# EAGLE board sensor 16 ADC (EAGLE 4.11)
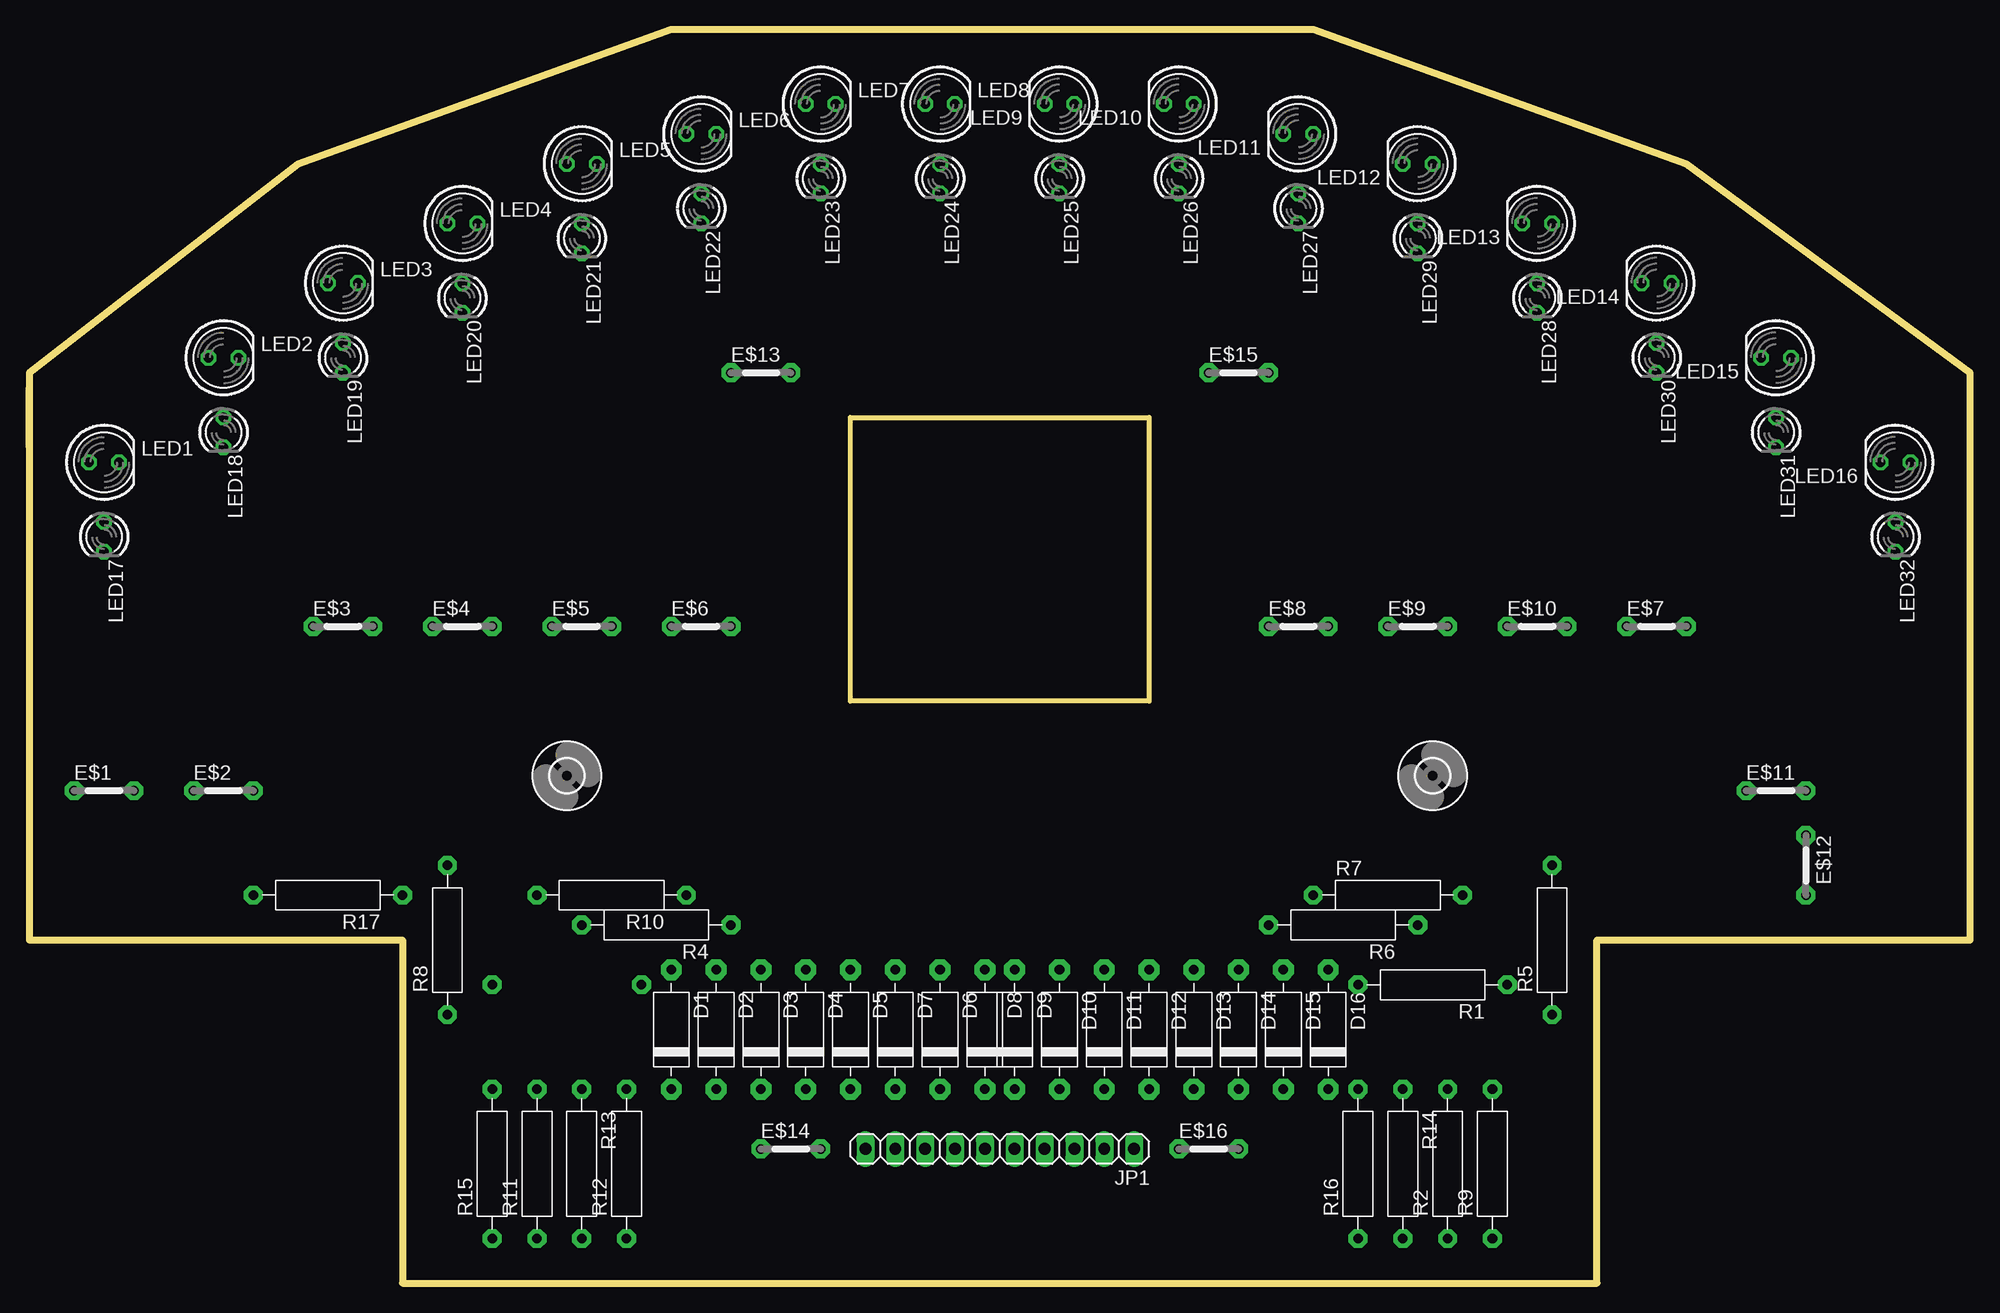
[diagram p0: board, top side]
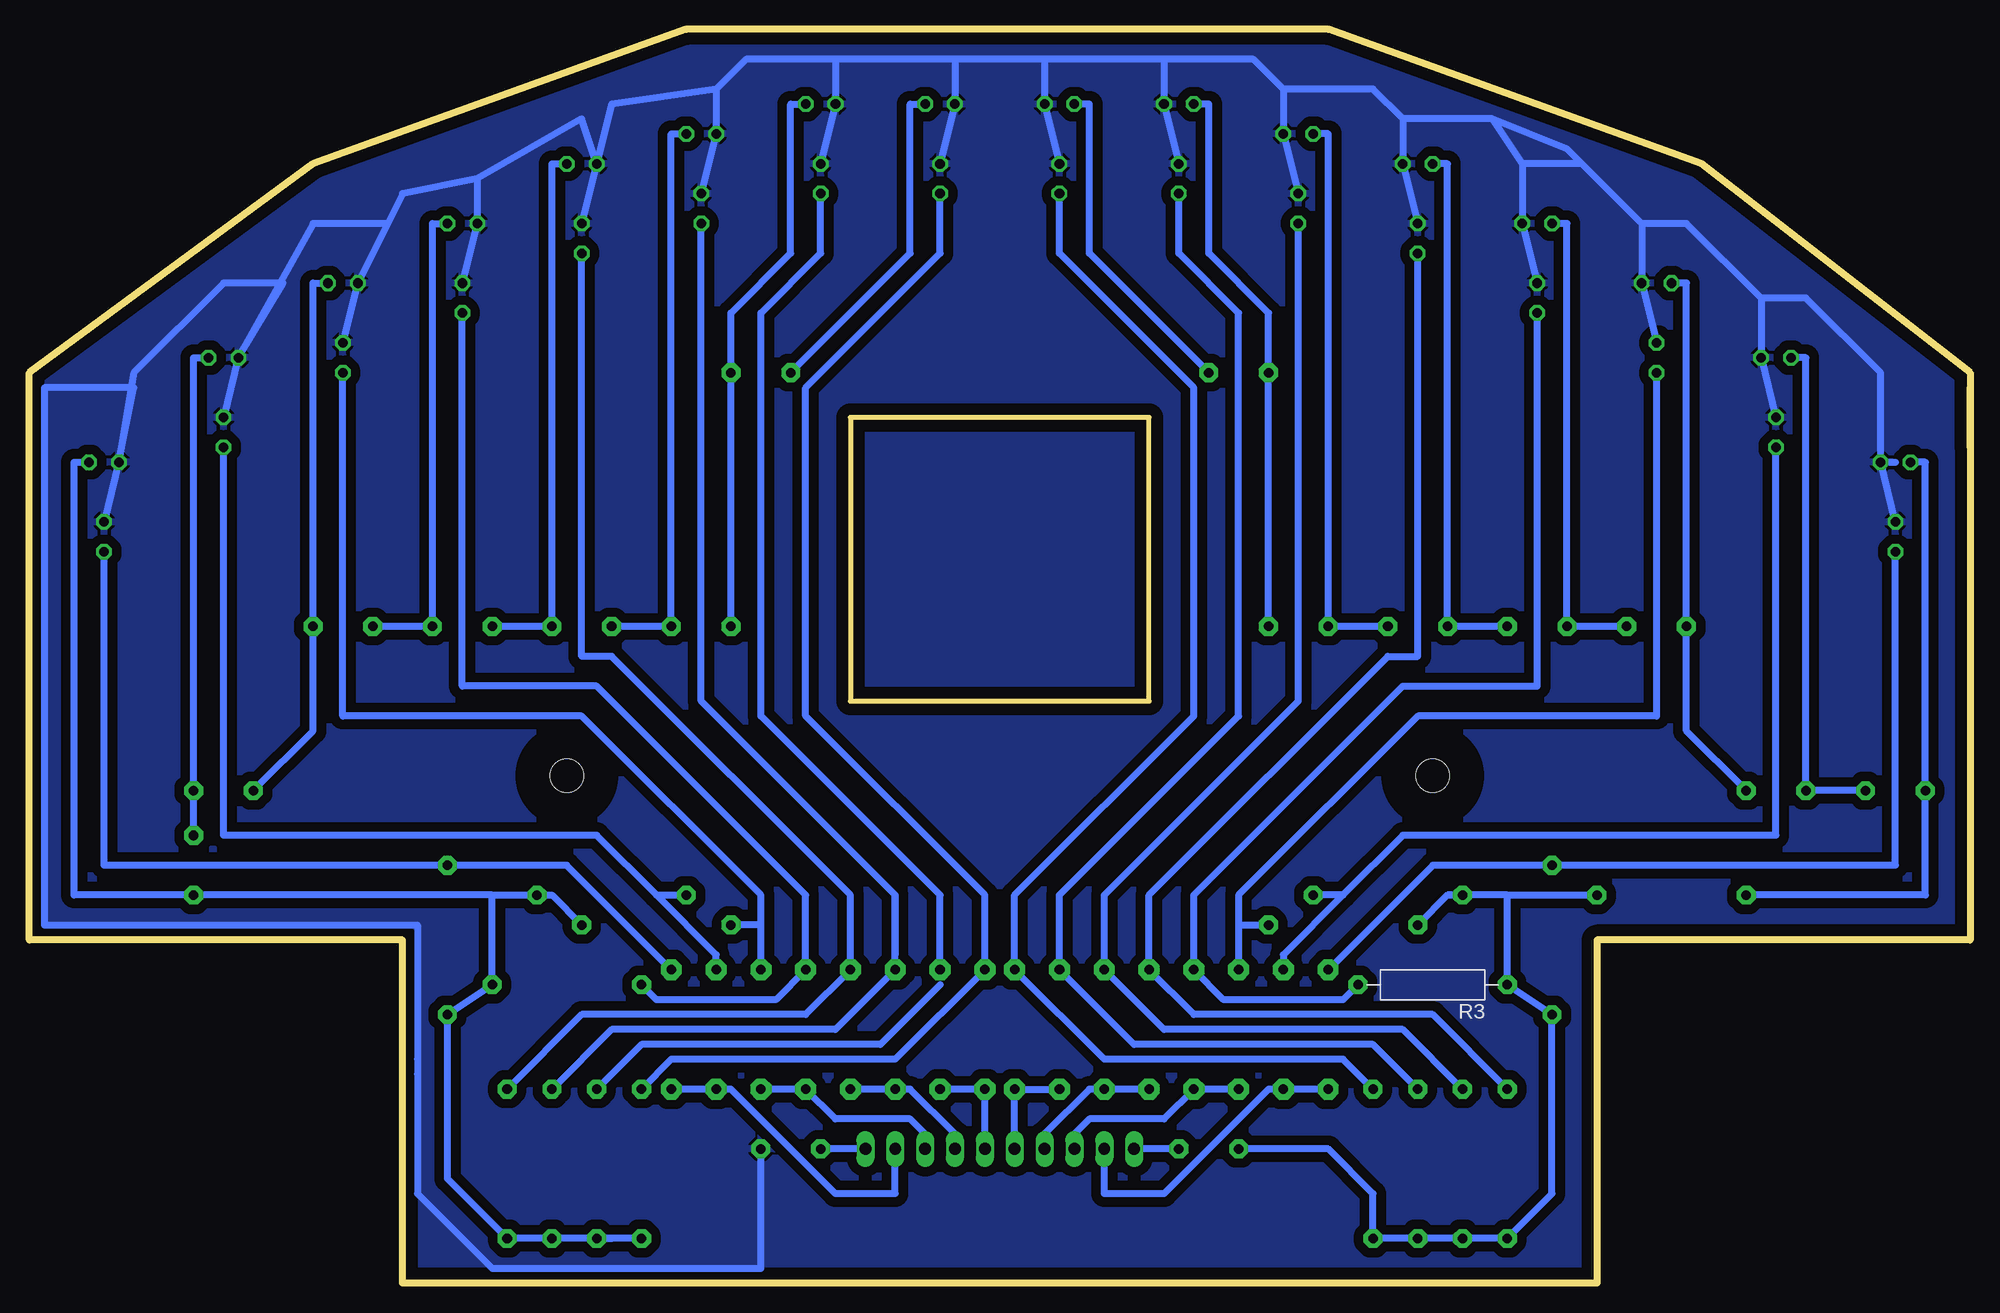
[diagram p1: board, bottom side, seen from below]

Size 165.1 x 106.68 mm. Coordinates in mm from the lower left corner, seen from the top.
Outline: 0,71.12 0,77.47 22.86,95.25 54.61,106.68 109.22,106.68 140.97,95.25 165.1,77.47 165.1,29.21 133.35,29.21 133.35,0 31.75,0 31.75,29.21 0,29.21 0,71.12
Outline: 0,71.12 0,76.2
Outline: 69.85,73.66 95.25,73.66 95.25,49.53 69.85,49.53 69.85,73.66
Copper layers (1*16): Top 0.035mm / dielectric 1.5mm / Bottom 0.035mm
Design rules "default": minimum track width 20mil, minimum drill 24mil, track to track 12mil, track to pad 12mil, pad to pad 12mil, via to via 12mil, smd to smd 8mil, copper to edge 40mil, drill to drill 8mil, minimum pad ring 10mil, minimum via ring 8mil, stop-mask expansion 4mil, vias tented up to drill 0mil, thermal gap 10mil

## Footprints (pad centres in the part's own frame; a part is rotated, then mirrored left to right if it is on the bottom)
D-10 = drill 0.813 pad 1.778 octagon: 1 -5.08,0; 2 5.08,0
05 = drill 0.813 pad 1.6 octagon: 1 -2.54,0; 2 2.54,0
2,8 = hole 2.8: 0,0
1X10 = drill 1.016 long: 1 -11.43,0; 2 -8.89,0; 3 -6.35,0; 4 -3.81,0; 5 -1.27,0; 6 1.27,0; 7 3.81,0; 8 6.35,0; 9 8.89,0; 10 11.43,0
LED5MM = drill 0.813 octagon: A -1.27,0; K 1.27,0
LED3MM = drill 0.813 octagon: A -1.27,0; K 1.27,0
R-12,5 = drill 0.813 pad 1.6 octagon: 1 -6.35,0; 2 6.35,0

## Placement (x,y rotation side)
D1  [D-10]  54.61,21.59 270 top
D2  [D-10]  58.42,21.59 270 top
D3  [D-10]  62.23,21.59 270 top
D4  [D-10]  66.04,21.59 270 top
D5  [D-10]  69.85,21.59 270 top
D6  [D-10]  77.47,21.59 270 top
D7  [D-10]  73.66,21.59 270 top
D8  [D-10]  81.28,21.59 270 top
D9  [D-10]  83.82,21.59 270 top
D10  [D-10]  87.63,21.59 270 top
D11  [D-10]  91.44,21.59 270 top
D12  [D-10]  95.25,21.59 270 top
D13  [D-10]  99.06,21.59 270 top
D14  [D-10]  102.87,21.59 270 top
D15  [D-10]  106.68,21.59 270 top
D16  [D-10]  110.49,21.59 270 top
E$1  [05]  6.35,41.91 0 top
E$2  [05]  16.51,41.91 0 top
E$3  [05]  26.67,55.88 0 top
E$4  [05]  36.83,55.88 0 top
E$5  [05]  46.99,55.88 0 top
E$6  [05]  57.15,55.88 0 top
E$7  [05]  138.43,55.88 0 top
E$8  [05]  107.95,55.88 0 top
E$9  [05]  118.11,55.88 0 top
E$10  [05]  128.27,55.88 0 top
E$11  [05]  148.59,41.91 0 top
E$12  [05]  151.13,35.56 270 top
E$13  [05]  62.23,77.47 0 top
E$14  [05]  64.77,11.43 0 top
E$15  [05]  102.87,77.47 0 top
E$16  [05]  100.33,11.43 0 top
H1  MOUNT-HOLE2.8  [2,8]  45.72,43.18 0 top
H2  MOUNT-HOLE2.8  [2,8]  119.38,43.18 0 top
JP1  [1X10]  82.55,11.43 180 top
LED1  [LED5MM]  6.35,69.85 0 top
LED2  [LED5MM]  16.51,78.74 0 top
LED3  [LED5MM]  26.67,85.09 0 top
LED4  [LED5MM]  36.83,90.17 0 top
LED5  [LED5MM]  46.99,95.25 0 top
LED6  [LED5MM]  57.15,97.79 0 top
LED7  [LED5MM]  67.31,100.33 0 top
LED8  [LED5MM]  77.47,100.33 0 top
LED9  [LED5MM]  87.63,100.33 180 top
LED10  [LED5MM]  97.79,100.33 180 top
LED11  [LED5MM]  107.95,97.79 180 top
LED12  [LED5MM]  118.11,95.25 180 top
LED13  [LED5MM]  128.27,90.17 180 top
LED14  [LED5MM]  138.43,85.09 180 top
LED15  [LED5MM]  148.59,78.74 180 top
LED16  [LED5MM]  158.75,69.85 180 top
LED17  [LED3MM]  6.35,63.5 270 top
LED18  [LED3MM]  16.51,72.39 270 top
LED19  [LED3MM]  26.67,78.74 270 top
LED20  [LED3MM]  36.83,83.82 270 top
LED21  [LED3MM]  46.99,88.9 270 top
LED22  [LED3MM]  57.15,91.44 270 top
LED23  [LED3MM]  67.31,93.98 270 top
LED24  [LED3MM]  77.47,93.98 270 top
LED25  [LED3MM]  87.63,93.98 270 top
LED26  [LED3MM]  97.79,93.98 270 top
LED27  [LED3MM]  107.95,91.44 270 top
LED28  [LED3MM]  128.27,83.82 270 top
LED29  [LED3MM]  118.11,88.9 270 top
LED30  [LED3MM]  138.43,78.74 270 top
LED31  [LED3MM]  148.59,72.39 270 top
LED32  [LED3MM]  158.75,63.5 270 top
R1  [R-12,5]  119.38,25.4 180 top
R2  [R-12,5]  120.65,10.16 90 top
R3  [R-12,5]  45.72,25.4 180 bottom
R4  [R-12,5]  53.34,30.48 180 top
R5  [R-12,5]  129.54,29.21 90 top
R6  [R-12,5]  111.76,30.48 180 top
R7  [R-12,5]  115.57,33.02 0 top
R8  [R-12,5]  35.56,29.21 90 top
R9  [R-12,5]  124.46,10.16 90 top
R10  [R-12,5]  49.53,33.02 180 top
R11  [R-12,5]  43.18,10.16 90 top
R12  [R-12,5]  50.8,10.16 90 top
R13  [R-12,5]  46.99,10.16 270 top
R14  [R-12,5]  116.84,10.16 270 top
R15  [R-12,5]  39.37,10.16 90 top
R16  [R-12,5]  113.03,10.16 90 top
R17  [R-12,5]  25.4,33.02 180 top

## Library data of the parts
D1-D16 R1-R17 = discrete
E$1-E$16 = jumper
H1 H2 = holes
JP1 = pinhead
LED1-LED32 = led

## Nets
N$18: E$1.2 E$2.1 LED2.A
S$1: D1.1 LED17.K R8.2
S$2: D8.1 LED24.K R12.2
S$3: D6.1 LED23.K R13.1
S$4: D7.1 LED22.K R11.2
S$5: D5.1 LED21.K R15.2
S$6: D4.1 LED20.K R3.2
S$7: D2.1 LED18.K R10.1
S$8: D3.1 LED19.K R4.1
S$9: D9.1 LED25.K R16.2
S$10: D10.1 LED26.K
S$11: D11.1 LED27.K R2.2
S$12: D12.1 LED29.K R9.2
S$13: D13.1 LED28.K R1.2
S$14: D14.1 LED30.K R6.2
S$15: D15.1 LED31.K R7.1
S$16: D16.1 LED32.K R5.2
S$17: E$16.2 LED1.K LED2.K LED3.K LED4.K LED5.K LED6.K LED7.K LED8.K LED9.K LED10.K LED11.K LED12.K LED13.K LED14.K LED15.K LED16.K LED17.A LED18.A LED20.A LED21.A LED22.A LED23.A LED24.A LED25.A LED26.A LED27.A LED28.A LED29.A LED30.A LED31.A LED32.A
S$33: D9.2 D10.2 JP1.5
S$34: D6.2 D8.2 JP1.6
S$35: D11.2 D12.2
S$36: D13.2 D14.2 JP1.3
S$37: D15.2 D16.2 JP1.2
S$38: D5.2 D7.2 JP1.7
S$39: D3.2 D4.2 JP1.8
S$40: D1.2 JP1.9
S$41: E$8.2 E$9.1 LED11.A
S$42: E$9.2 E$10.1 LED12.A
S$43: E$7.1 E$10.2 LED13.A
S$44: E$7.2 E$11.1 LED14.A
S$45: E$11.2 E$12.1 LED15.A
S$46: E$12.2 LED16.A R1.1 R2.1 R5.1 R6.1 R7.2 R9.1 R16.1
S$47: E$16.1 JP1.1
S$48: E$14.2 JP1.10
S$49: E$14.1 R3.1 R4.2 R8.1 R10.2 R11.1 R12.1 R13.2 R15.1 R17.1
S$51: R14.1
S$56: E$1.1 LED1.A R17.2
S$57: E$2.2 E$3.1 LED3.A
S$58: E$3.2 E$4.1 LED4.A
S$59: E$4.2 E$5.1 LED5.A
S$60: E$5.2 E$6.1 LED6.A
S$61: E$6.2 E$13.1 LED7.A
S$62: E$13.2 LED8.A
S$63: E$15.1 LED9.A
S$64: E$8.1 E$15.2 LED10.A

## Tracks (layer width: path | path; a pad name or v marks a point on that pad's centre or on a via)
N$18
  Bottom 0.61: LED2.A 13.97,78.74 E$2.1 E$1.2
S$1
  Bottom 0.61: LED17.K 6.35,35.56 R8.2 45.72,35.56 D1.1
S$2
  Bottom 0.61: LED24.K 77.47,87.63 66.04,76.2 66.04,48.26 81.28,33.02 D8.1 73.66,19.05 53.34,19.05 R12.2
S$3
  Bottom 0.61: LED23.K 67.31,87.63 62.23,82.55 62.23,48.26 77.47,33.02 D6.1 71.12,20.32 50.8,20.32 R13.1
S$4
  Bottom 0.61: R11.2 48.26,21.59 68.58,21.59 D7.1 73.66,33.02 57.15,49.53 LED22.K
S$5
  Bottom 0.61: LED21.K 46.99,53.34 49.53,53.34 69.85,33.02 D5.1 66.04,22.86 45.72,22.86 R15.2
S$6
  Bottom 0.61: LED20.K 36.83,50.8 48.26,50.8 66.04,33.02 D4.1 63.5,24.13 53.34,24.13 R3.2
S$7
  Bottom 0.61: LED18.K 16.51,38.1 48.26,38.1 53.34,33.02 | 53.34,33.02 58.42,27.94 D2.1 | 53.34,33.02 R10.1
S$8
  Bottom 0.61: LED19.K 26.67,48.26 46.99,48.26 62.23,33.02 62.23,30.48 | 62.23,30.48 D3.1 | 62.23,30.48 R4.1
S$9
  Bottom 0.61: LED25.K 87.63,87.63 99.06,76.2 99.06,48.26 83.82,33.02 D9.1 91.44,19.05 110.49,19.05 R16.2
S$10
  Bottom 0.61: LED26.K 97.79,87.63 102.87,82.55 102.87,48.26 87.63,33.02 D10.1
S$11
  Bottom 0.61: 91.44,33.02 91.44,27.94 | 91.44,33.02 107.95,49.53 LED27.K | 91.44,33.02 D11.1 96.52,21.59 115.57,21.59 R2.2
S$12
  Bottom 0.61: LED29.K 118.11,53.34 115.57,53.34 95.25,33.02 D12.1 99.06,22.86 118.11,22.86 R9.2
S$13
  Bottom 0.61: LED28.K 128.27,50.8 116.84,50.8 99.06,33.02 D13.1 101.6,24.13 111.76,24.13 R1.2
S$14
  Bottom 0.61: D14.1 102.87,30.48 | 102.87,30.48 102.87,33.02 118.11,48.26 138.43,48.26 LED30.K | 102.87,30.48 R6.2
S$15
  Bottom 0.61: D15.1 106.68,27.94 111.76,33.02 | 111.76,33.02 116.84,38.1 148.59,38.1 LED31.K | 111.76,33.02 R7.1
S$16
  Bottom 0.61: LED32.K 158.75,35.56 R5.2 119.38,35.56 D16.1
S$17
  Bottom 0.61: LED17.A LED1.K | LED1.K 6.35,69.85 | LED1.K 7.62,77.47 13.97,83.82 17.78,83.82 | LED18.A LED2.K 17.78,83.82 | 17.78,83.82 24.13,90.17 27.94,90.17 | 27.94,90.17 33.02,95.25 | 33.02,95.25 34.29,96.52 40.64,99.06 | 33.02,95.25 38.1,95.25 | LED20.A LED4.K 38.1,95.25 | 38.1,95.25 40.64,99.06 | 40.64,99.06 48.26,99.06 | LED21.A LED5.K 48.26,99.06 | 48.26,99.06 50.8,101.6 58.42,101.6 | LED22.A LED6.K 58.42,101.6 | 58.42,101.6 60.96,104.14 68.58,104.14 | LED23.A LED7.K 68.58,104.14 | 68.58,104.14 78.74,104.14 | LED24.A LED8.K 78.74,104.14 | 78.74,104.14 86.36,104.14 | LED25.A LED9.K 86.36,104.14 | 86.36,104.14 96.52,104.14 | LED26.A LED10.K 96.52,104.14 | 96.52,104.14 104.14,104.14 106.68,101.6 | LED27.A LED11.K 106.68,101.6 | 106.68,101.6 115.57,100.33 LED12.K | LED12.K LED29.A | LED12.K 118.11,99.06 127,93.98 | LED28.A LED13.K 127,93.98 | 127,93.98 133.35,92.71 134.62,90.17 | LED30.A LED14.K 134.62,90.17 | 134.62,90.17 140.97,90.17 LED15.K | LED15.K LED31.A | LED15.K 143.51,85.09 148.59,85.09 156.21,77.47 LED16.K | LED16.K LED32.A | LED16.K 156.21,76.2 163.83,76.2 163.83,30.48 132.08,30.48 132.08,19.05 | 132.08,19.05 132.08,17.78 | 132.08,19.05 132.08,7.62 125.73,1.27 102.87,1.27 E$16.2 | 26.67,80.01 LED3.K 27.94,90.17
  pour Bottom (isolate 0.813): 31.75,0 133.35,0 133.35,29.21 165.1,29.21 165.1,77.47 140.97,95.25 109.22,106.68 54.61,106.68 22.86,95.25 0,77.47 0,29.21 31.75,29.21
S$33
  Bottom 0.61: JP1.5 D9.2 D10.2
S$34
  Bottom 0.61: JP1.6 D8.2 D6.2
S$35
  Bottom 0.61: 86.36,12.7 90.17,16.51 D11.2 D12.2
S$36
  Bottom 0.61: JP1.3 88.9,12.7 90.17,13.97 96.52,13.97 D13.2 D14.2
S$37
  Bottom 0.61: JP1.2 91.44,7.62 96.52,7.62 105.41,16.51 D15.2 D16.2
S$38
  Bottom 0.61: JP1.7 78.74,12.7 74.93,16.51 D7.2 D5.2
S$39
  Bottom 0.61: JP1.8 76.2,12.7 74.93,13.97 68.58,13.97 D4.2 D3.2
S$40
  Bottom 0.61: D1.2 59.69,16.51 68.58,7.62 73.66,7.62 JP1.9
S$41
  Bottom 0.61: E$9.1 E$8.2 110.49,97.79 LED11.A
S$42
  Bottom 0.61: LED12.A 120.65,95.25 E$9.2 E$10.1
S$43
  Bottom 0.61: LED13.A 130.81,90.17 E$10.2 E$7.1
S$44
  Bottom 0.61: LED14.A 140.97,85.09 E$7.2 140.97,46.99 E$11.1
S$45
  Bottom 0.61: LED15.A 151.13,78.74 E$11.2 E$12.1
S$46
  Bottom 0.61: LED16.A 161.29,69.85 161.29,33.02 E$12.2 125.73,33.02 | R6.1 120.65,33.02 R7.2 125.73,33.02 | 125.73,33.02 R1.1 R5.1 129.54,8.89 R9.1 R2.1 116.84,3.81 | 116.84,3.81 115.57,3.81 | R16.1 116.84,3.81
S$47
  Bottom 0.61: JP1.1 E$16.1
S$48
  Bottom 0.61: E$14.2 JP1.10
S$49
  Bottom 0.61: E$14.1 54.61,11.43 50.8,7.62 R12.1 R13.2 R11.1 R15.1 35.56,7.62 R8.1 R3.1 39.37,33.02 | 39.37,33.02 44.45,33.02 | 44.45,33.02 R10.2 | 44.45,33.02 R4.2 | 39.37,33.02 R17.1
S$51
  Bottom 0.61: 87.63,25.4 92.71,20.32 113.03,20.32 R14.1
S$56
  Bottom 0.61: LED1.A 3.81,69.85 E$1.1 3.81,33.02 R17.2
S$57
  Bottom 0.61: LED3.A 24.13,85.09 E$3.1 24.13,46.99 E$2.2
S$58
  Bottom 0.61: E$3.2 E$4.1 34.29,90.17 LED4.A
S$59
  Bottom 0.61: LED5.A 44.45,95.25 E$5.1 E$4.2
S$60
  Bottom 0.61: E$5.2 E$6.1 54.61,97.79 LED6.A
S$61
  Bottom 0.61: LED7.A 64.77,100.33 64.77,87.63 59.69,82.55 E$13.1 E$6.2
S$62
  Bottom 0.61: E$13.2 74.93,87.63 74.93,100.33 LED8.A
S$63
  Bottom 0.61: LED9.A 90.17,100.33 90.17,87.63 E$15.1
S$64
  Bottom 0.61: LED10.A 100.33,100.33 100.33,87.63 105.41,82.55 E$15.2 E$8.1